# Altium PCB PCB1.PcbDoc
Units mm, origin at the board's own origin, x right, y up, seen from the top; angles counter-clockwise.
Board outline 137.54 x 10.79 mm, 2 copper layers (Top Layer, Bottom Layer); 10 components, 8 nets, 21 pads, 0 vias.
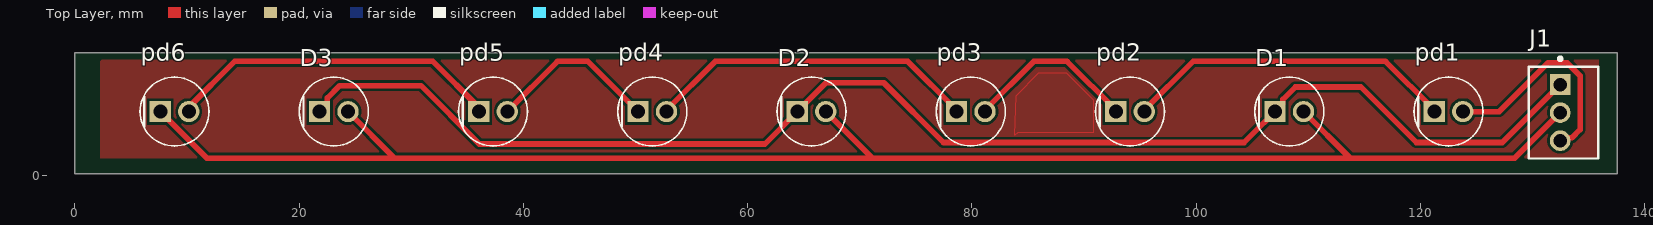
[diagram p0: Top Layer view]
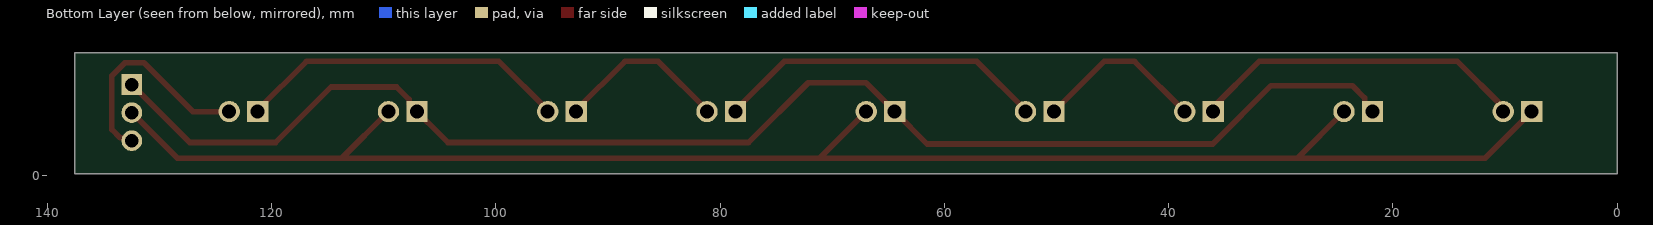
[diagram p1: Bottom Layer view, seen from below]
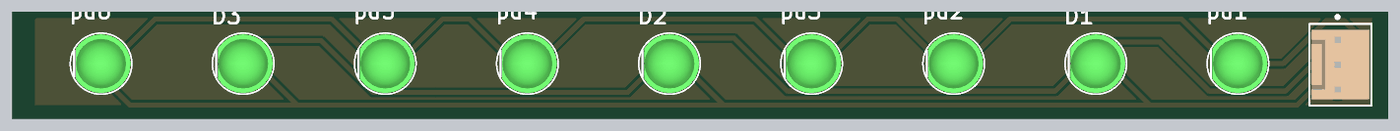
[diagram p2: 3D render of the assembled board from above, using the file's embedded part models]

## Layer stack, top to bottom
Top Solder: solder mask 0.0102, Solder Resist, Dk 3.5
Top Layer: signal copper 0.0356
Dielectric 1: dielectric 0.32, FR-4, Dk 4.8
Bottom Layer: signal copper 0.0356
Bottom Solder: solder mask 0.0102, Solder Resist, Dk 3.5

## Board outline
0,0.127 137.541,0.127 137.541,10.922 0,10.922

## Design rules (kind name [scope] priority, off if disabled: settings)
Clearance [All] p1: gap=0.254 ignorepadtopadclearanceinfootprint=FALSE
PolygonConnect [All] p1: connectstyle=Relief reliefconductorwidth=0.254 reliefentries=4 polygonreliefangle="90 Angle" airgapwidth=0.254
RoutingVias [All] p1: holewidth=0.711 width=1.27 viastyle="Through Hole" minholewidth=0.711 minwidth=1.27 maxholewidth=0.711 maxwidth=1.27
SolderMaskExpansion [All] p1: expansion=0.102 istentingtop=FALSE
Width [All] p1: maxlimit=0.254 minlimit=0.254 preferedwidth=0.254
30 further rules are at their usual default settings.

## Components (designator, comment, footprint, x,y, rotation, side; value= is the part's Value field where it differs from the comment)
D1 "LTL2P3KGKNN" FP-LTL2P3KGKNN-MFG 108.303,5.684 r0 top
D2 "LTL2P3KGKNN" FP-LTL2P3KGKNN-MFG 65.697,5.684 r0 top
D3 "LTL2P3KGKNN" FP-LTL2P3KGKNN-MFG 23.092,5.684 r0 top
J1 "22-04-1031" FP-22-04-1031-MFG 132.761,5.588 r90 top
pd1 "LTL2P3KGKNN" FP-LTL2P3KGKNN-MFG 122.505,5.684 r0 top
pd2 "LTL2P3KGKNN" FP-LTL2P3KGKNN-MFG 94.101,5.684 r0 top
pd3 "LTL2P3KGKNN" FP-LTL2P3KGKNN-MFG 79.899,5.684 r0 top
pd4 "LTL2P3KGKNN" FP-LTL2P3KGKNN-MFG 51.496,5.684 r0 top
pd5 "LTL2P3KGKNN" FP-LTL2P3KGKNN-MFG 37.294,5.684 r0 top
pd6 "LTL2P3KGKNN" FP-LTL2P3KGKNN-MFG 8.89,5.684 r0 top

## Footprints (in the part's own frame and the unit in brackets; to place one, negate y for a bottom-side part, rotate by r counter-clockwise, add the part's x,y. Pads: shape width x height; smd on the part's side, far side on the other; paste and mask are expansions set on the pad)
FP-22-04-1031-MFG [mm]
  rect 1.85x1.85 hole 1.2 paste-2539.97 mask+0: 1(2.5,0.3)
  round 1.85 hole 1.2 paste-2539.97 mask+0: 2(0,0.3) 3(-2.5,0.3)
  silkscreen extent -4.1,-3.1 4.95,3.1, body extent -4.2,-3.2 4.2,3.2, height 0.25
FP-LTL2P3KGKNN-MFG [mm]
  rect 1.9x1.9 hole 1.25 paste-2539.97 mask+0: 1(-1.27,0)
  round 1.9 hole 1.25 paste-2539.97 mask+0: 2(1.27,0)
  silkscreen extent -3.08,-3.08 3.08,3.08, body extent -3.17,-3.17 3.17,3.17, height 0.25

## Part data
D1 D2 D3 pd1 pd2 pd3 pd4 pd5 pd6: library part CMP-22017-000002-1, "LED GREEN CLEAR T-1 3/4 T/H", Colour=Green, Forward Current=20mA, Forward Voltage=2.1V, Manufacturer=Lite-On, Package=0, Power Dissipation=75mW, Reverse Voltage=5V, Temperature="-40°C to +100°C", Temperature Range High=+100°C, Temperature Range Low=-40°C, Automotive=No, Category=Diode, ComponentLink2Description=Datasheet, ComponentLink2URL=https://optoelectronics.liteon.com/upload/download/DS20-2000-193/LTL2P3KGKNN.pdf, Device Class L1=Optoelectronics, Device Class L2=LEDs, Device Class L3=unset, Digikey Description="LED GREEN CLEAR T-1 3/4 T/H", Height=9.95mm, Lead Free=Yes, Led Orientation=Straight, Luminous Intensity=980mcd, Manufacturer Part Number=LTL2P3KGKNN, Mouser Description="LED Uni-Color Green 575nm 2-Pin T-1 3/4", Octopart=https://octopart.com/ltl2p3kgknn-lite-on-550036, Peak Emmision Wavelength=575nm, RoHS=TRUE, Viewing Angle=22°, Wavelength=572nm
J1: library part CMP-04776-000410-1, "CONN HEADER VERT 3POS 2.5MM", Color=Natural, Contact Resistance=20mR, Current Rating=3A, Flammability Rating="UL94 V-0", Insulation Resistance=1GR, Max Operating Temperature=105°C, Max Voltage Rating (DC)=250.25kV, Min Operating Temperature=-40°C, Package Quantity=1, Voltage Rating=250V, Connector Type="Male Pin", Contact Gender=Male, Contact Material=Brass, Contact Mating Length=0.295inch, Contact Plating=Tin, Contact Type="Male Pin", Fastening Type=Friction, Gender=Male, Glow Wire Compliant=Non-compliant, Halogen Free="Low Halogen", Hole Diameter=1.19mm, Housing Color=Natural, Housing Material=Nylon, Lead Free="Lead Free", Lead Pitch=2.5mm, Mount="Through Hole", Number of Circuits=3, Number of Contacts=3, Number of Poles=3, Number of Positions=3, Number of Rows=1, Orientation=Straight, Packaging=Bulk, Pitch=2.5mm, Radiation Hardening=No, Series=KK, Termination=Solder, Voltage Rating (AC)=250V, Voltage Rating (DC)=250V, Working Voltage=250V

## Nets (pads, with @x,y where several pads share a name; then routed paths per layer and width w, separated by ;. In a path a pad name is that pad's centre, name@x,y a point inside that pad or via, vN(x,y) a via of type N, cw(c..) or ccw(c..) an arc to the next point about the centre after c; other vN are vias at no path point)
NetD1_1: D1.1 D2.1 D3.1 J1.1 | length 125
  Top Layer w0.5: D3.1 22.522,6.384 22.522,6.901 23.622,8.001 30.861,8.001 36.068,2.794 61.537,2.794 D2.1 66.998,8.255 72.136,8.255 77.47,2.921 104.27,2.921 107.733,6.384 107.733,6.768 108.839,7.874 114.681,7.874 119.634,2.921 127.294,2.921 J1.1
NetD1_2: D1.2 D2.2 D3.2 J1.2 pd6.1 | length 145.9
  Top Layer w0.5: pd6.1 11.78,1.524 28.522,1.524 ; D3.2 28.522,1.524 ; D2.2 71.128,1.524 ; D1.2 113.733,1.524 ; J1.2 128.397,1.524 113.733,1.524 ; 28.522,1.524 71.128,1.524 ; 71.128,1.524 113.733,1.524
NetJ1_3: J1.3 pd1.2 | length 19.7
  Top Layer w0.5: pd1.2 127.027,5.684 131.376,10.033 133.079,10.033 134.235,8.877 134.235,4.071 133.51,3.346 132.719,3.346 J1.3
Netpd1_1: pd1.1 pd2.2 | length 29.5
  Top Layer w0.5: pd2.2@95.371,5.811 99.72,10.16 116.886,10.16 pd1.1@121.235,5.811
Netpd2_1: pd2.1 pd3.2 | length 15.3
  Top Layer w0.5: pd3.2@81.169,5.811 85.518,10.16 88.482,10.16 pd2.1@92.831,5.811
Netpd3_1: pd3.1 pd4.2 | length 29.5
  Top Layer w0.5: pd4.2@52.766,5.811 57.114,10.16 74.281,10.16 pd3.1@78.629,5.811
Netpd4_1: pd4.1 pd5.2 | length 15.4
  Top Layer w0.5: pd5.2 43.039,10.16 45.75,10.16 pd4.1
Netpd5_1: pd5.1 pd6.2 | length 29.3
  Top Layer w0.5: pd6.2@10.16,6.065 14.255,10.16 31.929,10.16 pd5.1@36.024,6.065

## Polygon pours and split planes (outlines as drawn)
no net on Top Layer "NONET_L01_P001" (solid, pour order 1): 2.286,10.16 2.413,10.287 135.89,10.287 135.89,1.778 135.636,1.524 2.286,1.524
no net on Top Layer "NONET_L01_P000" (solid, pour order 0): 83.947,7.112 85.979,9.144 88.392,9.144 90.805,6.731 90.805,3.81 84.074,3.81 83.82,3.556